# Altium PCB rtm-damp-dvb.PcbDoc (part 3 of 3)
Units mm, origin at the board's own origin, x right, y up, seen from the top; angles counter-clockwise.
Board outline 152.4 x 101.6 mm, 4 copper layers (Top Layer, GND, Vcc, Bottom Layer), stack 0.777 mm thick; 196 components, 95 nets, 559 pads, 90 vias.
Unrouted connection lines stored in the file: 129.
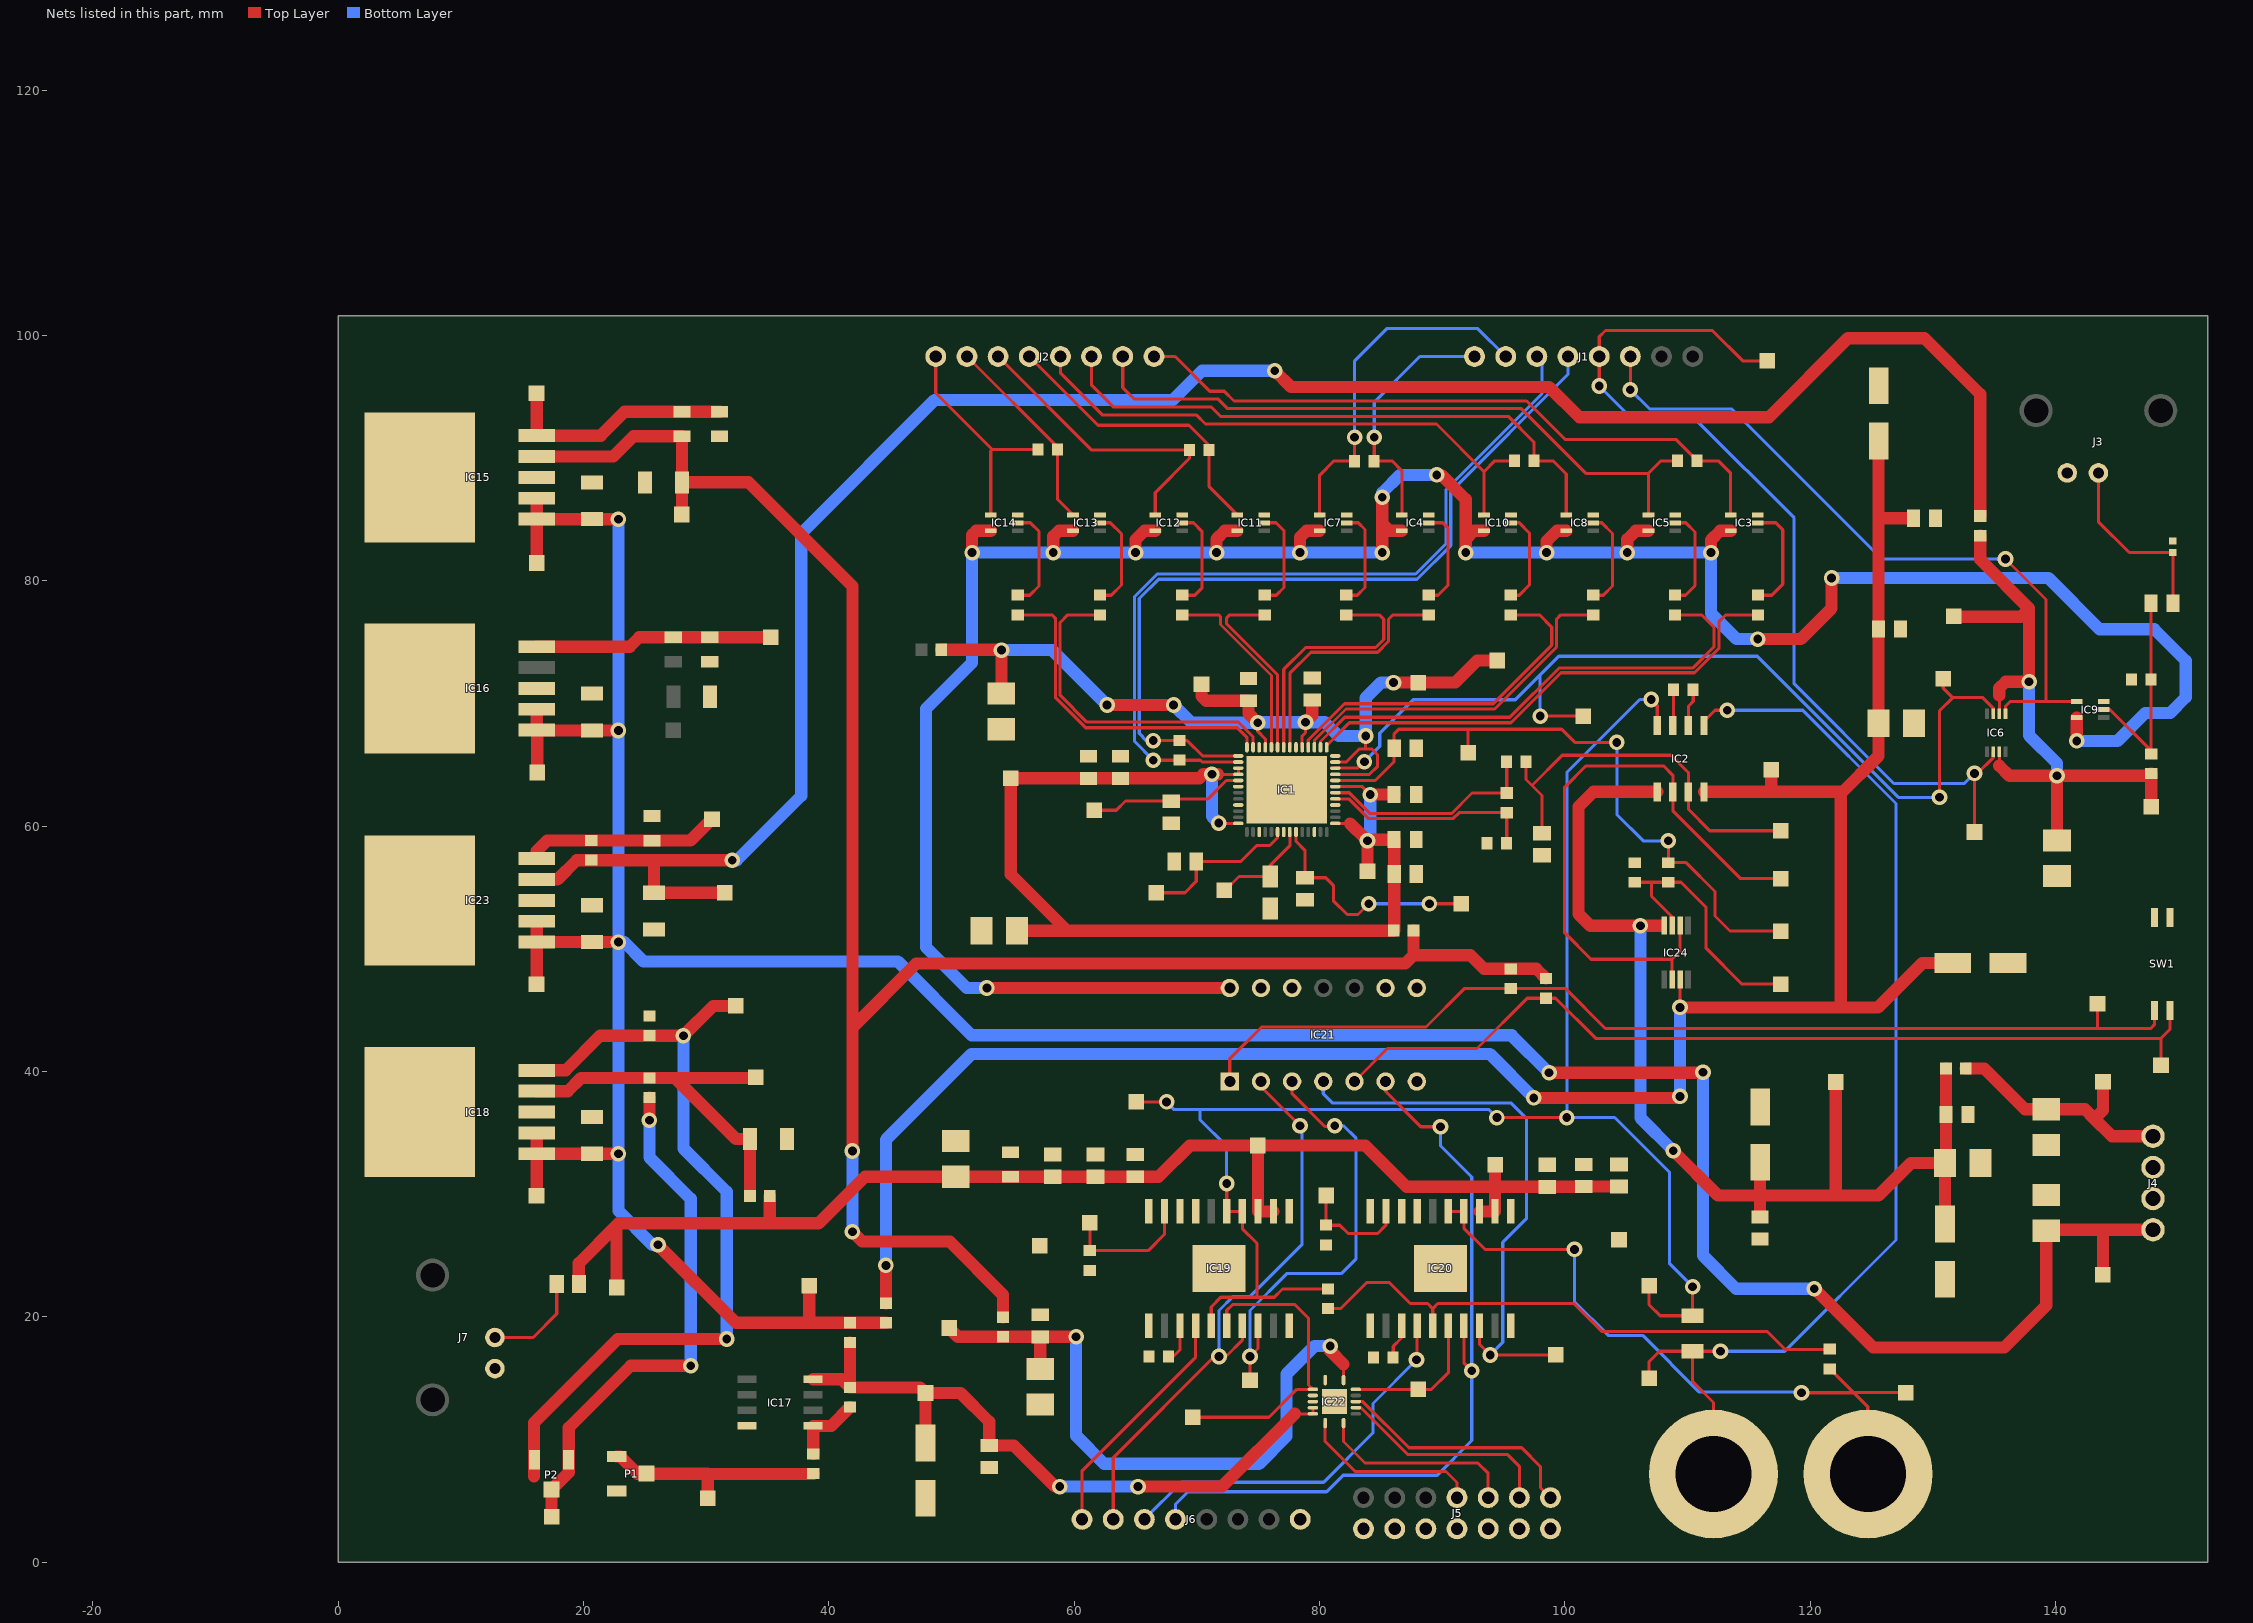
[diagram p4: the nets of this part, all layers, seen from the top]

## Via types
v1: diameter 1.27, hole 0.711, Top Layer to Bottom Layer, 90 vias

## Nets (pads, with @x,y where several pads share a name; then routed paths per layer and width w, separated by ;. In a path a pad name is that pad's centre, name@x,y a point inside that pad or via, vN(x,y) a via of type N, cw(c..) or ccw(c..) an arc to the next point about the centre after c; other vN are vias at no path point) (continued)
+2V5_ADC: +2V5_ADC.1 C8.2 C9.2 C47.1 DDR_ADC.1 IC1.23 IC1.25 IC1.31 IC1.37 L4.2 LVDS_ADC.1 | length 79.5
  Top Layer w0.254: v1(74.95,68.425) 74.95,67.725 75.575,67.1 IC1.37@75.575,66.425 ; IC1.31@78.575,66.425 78.575,67.35 78.85,67.625 v1(78.85,68.475) ; IC1.23@81.275,64.225 81.29,64.21 84.06,64.21 84.725,64.875 84.725,65.8 84.225,66.3 83.738,66.3 ; IC1.25@81.275,65.225 82.175,65.225 83.25,66.3 83.738,66.3 ; v1(83.75,67.35) 83.75,66.312 83.738,66.3
  Top Layer w1: L4.2@49.15,74.375 v1@54.075,74.375 ; C47.1@54.075,70.8 v1(54.075,74.35) ; v1(62.675,69.875) v1(68.1,69.875) ; +2V5_ADC.1@70.375,71.575 70.375,70.6 70.75,70.225 C8.2@74.2,70.225 74.2,69.175 v1(74.95,68.425) ; v1(78.85,68.475) 79.4,69.025 C9.2@79.4,70.275 ; v1(86.025,71.7) LVDS_ADC.1@88.025,71.7 91.05,71.7 92.85,73.5 DDR_ADC.1@94.475,73.5
  Bottom Layer w1: v1(54.075,74.35) 58.2,74.35 v1(62.675,69.875) ; v1(68.1,69.875) 69.55,68.425 v1(74.95,68.425) 75,68.475 v1(78.85,68.475) 80.425,68.475 81.55,67.35 v1(83.75,67.35) 83.75,70.45 85,71.7 v1(86.025,71.7)
+3V6: +3V6_LDO.1 C41.2 IC23.4 L5.1 R40.2 | length 171.8
  Top Layer w1: IC23.4@16.2,55.65 17.875,55.65 19.45,57.225 R40.2@20.625,57.225 25.75,57.225 ; +3V6_LDO.1@31.525,54.575 C41.2@25.75,54.575 25.75,57.225 ; v1(32.125,57.225) 25.75,57.225 ; v1(76.35,97.125) 77.675,95.8 98.7,95.8 101.175,93.325 116.625,93.325 123.075,99.775 129.275,99.775 133.85,95.2 L5.1@133.85,85.275
  Bottom Layer w1: v1(32.125,57.225) 32.5,57.225 37.75,62.475 37.75,83.85 48.625,94.725 68.025,94.725 70.425,97.125 v1(76.35,97.125)
+3V6_CLK: +3V6_Clock_1.1 +3V6_Clock_2.1 C48.1 IC6.2 IC6.7 L5.2 R11.2 | length 55.2
  Top Layer w0.254: 135.4,64.925 IC6.7@135.4,66.05 ; IC6.2@135.4,69.15 135.4,70.65
  Top Layer w1: +3V6_Clock_2.1@131.675,77.075 137.15,77.075 137.825,77.75 ; L5.2@133.85,83.675 133.85,81.725 137.825,77.75 ; 135.4,64.925 136.225,64.1 v1(140.1,64.1) ; 135.4,70.65 135.4,71.25 135.925,71.775 v1(137.825,71.775) 137.825,77.75 ; C48.1@140.1,58.825 v1(140.1,64.1) ; R11.2@147.75,64.3 147.55,64.1 v1(140.1,64.1) ; +3V6_Clock_1.1@147.775,61.575 R11.2@147.775,64.3
  Bottom Layer w1: v1(137.825,71.775) 137.825,67.4 140.1,65.125 v1(140.1,64.1)
+5V: +5V_LDO.1 C21.2 IC15.4 L3.1 L7.1 R23.2 R37.1 R38.1 | length 166.9
  Top Layer w1: IC15.4@16.2,90.125 22.425,90.125 24.075,91.775 R23.2@28.025,91.775 C21.2@28.025,88.025 ; +5V_LDO.1@28.025,85.4 C21.2@28.025,88.025 ; v1(41.925,26.95) 42.725,26.15 49.85,26.15 54.2,21.8 L7.1@54.2,19.975 ; v1(41.925,33.525) 41.925,79.55 33.45,88.025 C21.2@28.025,88.025 ; 41.925,43.6 47.125,48.8 86.975,48.8 87.65,49.475 ; L3.1@87.65,51.5 87.65,49.475 ; R38.1@98.45,47.575 97.65,48.375 R37.1@95.575,48.375 93.4,48.375 92.3,49.475 87.65,49.475
  Bottom Layer w1: v1(41.925,26.95) v1(41.925,33.525)
+5V_ADC: +5V_ADC.1 +5V_REFBUFEN.1 C14.2 C15.2 C16.2 C17.2 C18.2 C46.1 IC1.15 IC1.21 IC1.43 IC1.44 IC1.52 L3.2 | length 94.3
  Top Layer w0.254: v1@71.725,64.225 IC1.44@73.375,64.225 IC1.43@73.375,64.725 ; v1@71.775,60.225 IC1.52@73.375,60.225 ; IC1.15@81.275,60.225 82.475,60.225 ; IC1.21@81.275,63.225 83.475,63.225 v1(84.125,62.575)
  Top Layer w1: C46.1@55.35,51.475 59.425,51.475 ; v1@71.725,64.225 v1(71.225,64.225) 70.525,64.225 70.2,63.9 C15.2@63.775,63.9 C16.2@61.175,63.9 +5V_REFBUFEN.1@54.825,63.9 54.825,56.075 59.425,51.475 ; 82.475,60.225 v1@83.8,58.9 ; +5V_ADC.1@83.9,56.325 v1(83.9,58.8) v1@83.8,58.9 ; v1(84.125,62.575) C17.2@86.075,62.575 ; 59.425,51.475 86.025,51.475 L3.2@86.05,51.5 86.075,51.525 C14.2@86.075,56.1 C18.2@86.075,58.9 v1@83.8,58.9
  Bottom Layer w1: v1(71.225,64.225) 71.225,60.8 v1(71.775,60.25) ; v1(83.9,58.8) 84.125,59.025 v1(84.125,62.575)
+5V_DAC: +5V_DAC.1 C39.2 C50.1 IC22.14 L7.2 | length 53.2
  Top Layer w0.254: IC22.14@81.95,14.85 81.95,16.15
  Top Layer w1: +5V_DAC.1@49.8,19.1 50.525,18.375 L7.2@54.2,18.375 C39.2@57.225,18.375 ; C50.1@57.225,15.75 C39.2@57.225,18.375 ; v1(60.15,18.375) C39.2@57.225,18.375 ; v1(80.875,17.625) 80.875,17.225 81.95,16.15
  Bottom Layer w1: v1(60.15,18.375) 60.15,10.325 62.45,8.025 75.05,8.025 77.3,10.275 77.3,15.35 79.575,17.625 v1(80.875,17.625)
+7V: +7V_supply.1 C20.2 C22.2 C24.1 C28.2 C40.2 IC15.1 IC15.2 IC16.1 IC16.2 IC18.1 IC18.2 IC23.1 IC23.2 J4.1 L1.1 R28.2 Supply_+2V5.1 Supply_+3V6.1 Supply_+5V.1 Supply_Vref.1 Supply_Vs+.1 | length 291.2
  Top Layer w1: Supply_Vs+.1@16.175,29.875 16.2,29.9 IC18.1@16.2,33.3 ; Supply_+3V6.1@16.175,47.1 16.2,47.125 IC23.1@16.2,50.55 ; IC18.2@16.2,35 IC18.1@16.2,33.3 ; IC23.2@16.2,52.25 IC23.1@16.2,50.55 ; IC16.2@16.2,69.525 IC16.1@16.2,67.825 IC16.1@16.225,67.8 ; Supply_+5V.1@16.2,81.45 IC15.1@16.2,85.025 ; IC15.2@16.2,86.725 IC15.1@16.2,85.025 ; Supply_+2V5.1@16.225,64.375 IC16.1@16.225,67.8 ; v1(22.85,33.3) C28.2@20.7,33.3 IC18.1@16.2,33.3 ; v1(22.85,50.55) C40.2@20.7,50.55 IC23.1@16.2,50.55 ; v1(22.85,67.8) C20.2@20.7,67.8 IC16.1@16.225,67.8 ; v1(22.85,85.025) C22.2@20.7,85.025 IC15.1@16.2,85.025 ; v1(26.075,25.875) 32.425,19.525 38.275,19.525 ; Supply_Vref.1@38.4,22.55 38.4,19.65 38.275,19.525 ; L1.1@44.65,19.525 R28.2@41.725,19.525 38.275,19.525 ; v1(98.7,39.9) 111.2,39.9 v1(111.25,39.95) ; v1(120.325,22.3) 125.125,17.5 135.8,17.5 139.225,20.925 C24.1@139.225,27.025 139.305,27.105 143.8,27.105 ; +7V_supply.1@143.85,23.425 143.85,27.055 143.8,27.105 ; J4.1@147.925,27.105 143.8,27.105
  Bottom Layer w1: v1(22.85,85.025) v1(22.85,67.8) v1(22.85,50.55) ; v1(26.075,25.875) 25.625,25.875 22.85,28.65 v1(22.85,33.3) v1(22.85,50.55) ; v1(98.7,39.9) 95.65,42.95 51.65,42.95 45.625,48.975 24.9,48.975 23.325,50.55 v1(22.85,50.55) ; v1(111.25,39.95) 111.25,25 113.95,22.3 v1(120.325,22.3)
+7V_opamp: +7V_opamp.1 C1.1 C2.1 C26.1 C42.1 C43.2 IC2.8 IC24.7 L1.2 | length 179.3
  Top Layer w0.254: v1(109.375,45.225) IC24.7@109.375,47.5
  Top Layer w1: L1.2@44.65,21.125 v1(44.65,24.2) ; v1(97.45,37.85) 109.25,37.85 v1(109.375,37.975) ; v1(109.375,45.225) 122.475,45.225 ; IC2.8@111.33,62.8 116.85,62.8 ; +7V_opamp.1@116.8,64.6 116.8,62.85 116.85,62.8 ; 122.388,62.563 125.55,65.725 C26.1@125.55,68.4 C43.2@125.55,76.075 C2.1@125.55,91.4 ; 125.55,85.1 C1.1@128.4,85.1 ; C42.1@131.6,48.85 129.125,48.85 125.5,45.225 122.475,45.225 ; 116.85,62.8 122.475,62.8 122.475,45.225
  Bottom Layer w1: v1(44.65,24.2) 44.65,34.45 51.625,41.425 93.875,41.425 v1(97.45,37.85) ; v1(109.375,37.975) v1(109.375,45.225)
+Vref: +Vref_DAC.1 C37.1 C38.2 IC17.8 IC22.5 IC22.6 R28.1 R30.2 | length 56.2
  Top Layer w0.254: 77.975,12.1 IC22.6@79.45,12.1 IC22.5@79.45,12.6
  Top Layer w1: IC17.8@38.725,14.93 41.045,14.93 R30.2@41.725,14.25 ; R28.1@41.725,17.925 R30.2@41.725,14.25 ; C37.1@47.875,9.725 +Vref_DAC.1@47.875,13.8 ; v1(58.825,6.175) 58.425,6.175 55.075,9.525 C38.2@53.075,9.525 53.075,11.45 50.725,13.8 +Vref_DAC.1@47.875,13.8 ; v1(65.2,6.175) 72.05,6.175 77.975,12.1 ; R30.2@41.725,14.25 47.425,14.25 +Vref_DAC.1@47.875,13.8
  Bottom Layer w1: v1(58.825,6.175) v1(65.2,6.175)
-7V: -7V_supply.1 C25.2 J4.4 L2.1 | length 20.9
  Top Layer w1: L2.1@132.65,40.25 134.175,40.25 137.5,36.925 C25.2@139.225,36.925 142.375,36.925 143.075,36.225 ; -7V_supply.1@143.85,39.175 143.85,36.85 143.225,36.225 143.075,36.225 ; J4.4@147.925,34.725 144.575,34.725 143.075,36.225
-7V_opamp: -7V_opamp.1 C5.2 C6.2 C27.2 C44.2 C45.2 IC2.5 IC24.4 L2.2 | length 93.5
  Top Layer w1: IC2.5@107.52,62.8 102.325,62.8 101.1,61.575 101.1,52.85 102.075,51.875 v1(106.15,51.875) 107.822,51.875 ; v1(108.825,33.55) 112.475,29.9 115.9,29.9 ; C45.2@115.9,28.15 115.9,29.9 ; C44.2@115.9,32.6 115.9,29.9 ; -7V_opamp.1@122.075,39.15 122.075,30.1 122.275,29.9 ; C5.2@130.975,27.575 C27.2@130.975,32.55 ; L2.2@131.05,40.25 C6.2@131.05,36.5 131.05,32.625 130.975,32.625 130.9,32.55 128.2,32.55 125.55,29.9 122.275,29.9 ; 115.9,29.9 122.275,29.9
  Bottom Layer w1: v1(106.15,51.875) 106.15,36.225 v1(108.825,33.55)
AIN1_N: C3.1 IC1.19 R3.2 | length 17.3
  Top Layer w0.254: IC1.19@81.275,62.225 82.375,62.225 83.962,60.638 90.906,60.638 91.368,61.1 C3.1@95.25,61.1 R3.2@95.25,58.6
AIN1_P: C3.2 IC1.20 R1.2 | length 17.9
  Top Layer w0.254: IC1.20@81.275,62.725 82.418,62.725 84.122,61.022 90.747,61.022 92.425,62.7 C3.2@95.25,62.7 R1.2@95.25,65.25
C\L\R\: CLR_clk.1 CLR_con.1 IC6.6 J1.5 | length 78.5
  Top Layer w0.254: v1(102.8,95.875) 102.79,95.885 J1.5@102.79,98.275 102.79,99.89 103.3,100.4 112,100.4 114.475,97.925 CLR_con.1@116.5,97.925 ; CLR_clk.1@133.375,59.525 v1(133.375,64.3) 133.621,64.3 134.9,65.579 IC6.6@134.9,66.05
  Bottom Layer w0.254: v1(102.8,95.875) 105.7,92.975 110.825,92.975 118.675,85.125 118.675,71.6 126.8,63.475 132.55,63.475 v1(133.375,64.3)
C\N\V\: CNV_ADC.1 CNV_clk.1 IC1.24 IC6.3 | length 79.8
  Top Layer w0.254: IC1.24@81.275,64.725 83.075,64.725 83.6,65.25 v1(83.65,65.25) ; v1(97.975,68.975) CNV_ADC.1@101.5,68.975 ; v1(130.525,62.35) 130.525,69.4 131.6,70.475 ; CNV_clk.1@130.825,72.025 130.825,71.25 131.6,70.475 ; IC6.3@134.9,69.15 134.9,69.621 134.046,70.475 131.6,70.475
  Bottom Layer w0.254: v1(83.65,65.25) 84.9,66.5 84.9,67.575 87.625,70.3 95.95,70.3 97.9,72.25 ; v1(97.975,68.975) 97.975,72.175 97.9,72.25 ; v1(130.525,62.35) 127.175,62.35 115.675,73.85 99.5,73.85 97.9,72.25
C\S\_DAC: IC22.7 J5.7 | length 14.9
  Top Layer w0.254: IC22.7@80.45,11.35 80.45,9.85 82.9,7.4 90.3,7.4 91.2,6.5 J5.7@91.2,5.27
CLKOUT_N: IC1.34 R10.2 | length 20.3
  Top Layer w0.254: IC1.34@77.075,66.425 77.075,72.775 78.859,74.559 84.566,74.559 85.225,75.218 85.225,76.85 84.85,77.225 R10.2@82.175,77.225
CLKOUT_P: IC1.33 R7.2 | length 20.4
  Top Layer w0.254: IC1.33@77.575,66.425 77.575,72.45 79.3,74.175 84.725,74.175 85.609,75.059 85.609,76.85 85.984,77.225 R7.2@88.9,77.225
Enable_1: EN_1_SW.1 IC21.1 R37.2 SW1.1 | length 84.2
  Top Layer w0.254: IC21.1@72.68,39.19 72.68,41.03 75.275,43.625 88.675,43.625 91.825,46.775 R37.2@95.575,46.775 100.025,46.775 103.287,43.513 143.4,43.513 ; EN_1_SW.1@143.4,45.525 143.4,43.513 ; SW1.1@148.04,44.975 148.04,43.815 147.737,43.513 143.4,43.513
Enable_2: EN_2_SW.1 IC21.5 R38.2 SW1.2 | length 74.7
  Top Layer w0.254: IC21.5@82.84,39.19 85.525,41.875 92.825,41.875 96.925,45.975 R38.2@98.45,45.975 99.225,45.975 102.5,42.7 148.575,42.7 ; EN_2_SW.1@148.575,40.525 148.575,42.7 ; SW1.2@149.31,44.975 149.31,43.435 148.575,42.7
GND: C1.2 C2.2 C4.1 C5.1 C6.1 C7.2 C8.1 C9.1 C10.1 C11.1 C12.1 C13.1 C14.1 C15.1 C16.1 C17.1 C18.1 C20.1 C21.1 C22.1 C23.1 C24.2 C25.1 C26.2 C27.1 C28.1 C29.1 C30.2 C31.2 C32.2 C33.2 C34.1 C35.1 C37.2 C38.1 C39.1 C40.1 C41.1 C42.2 C43.1 C44.1 C45.1 C46.2 C47.2 C48.2 C49.2 C50.2 IC1.3 IC1.7 IC1.12 IC1.18 IC1.26 IC1.32 IC1.38 IC1.46 IC1.49 IC1.53 IC3.3 IC4.3 IC5.3 IC7.3 IC8.3 IC9.3 IC10.3 IC11.3 IC12.3 IC13.3 IC14.3 IC15.3 IC15.6 IC16.3 IC16.6 IC17.4 IC18.3 IC18.6 IC19.1 IC19.10 IC19.11 IC19.17 IC19.18 IC19.20 IC19.21 IC20.1 IC20.10 IC20.11 IC20.17 IC20.18 IC20.20 IC20.21 IC21.7 IC21.8 IC21.9 IC21.12 IC21.13 IC22.1 IC22.3 IC22.4 IC22.15 IC23.3 IC23.6 J3.2 J4.2 J4.3 J5.2 J5.4 J5.6 J5.8 J5.10 J5.12 J5.14 J6.8 J7.2 P1.3 R3.1 R15.1 R16.1 R25.1 R26.1 R29.1 R33.2 R34.1 R35.2 R36.1 R39.1 R41.1 R44.1 SW1.3 SW1.4 Vs-_1.1 Vs-_2.1
IFLAG_1: IC19.4 J6.1 | length 19.6
  Top Layer w0.254: J6.1@60.64,3.5 60.64,7.465 69.895,16.72 IC19.4@69.895,19.3
IFLAG_2: IC20.4 J6.3 | length 31.9
  Top Layer w0.254: J6.3@65.72,3.5 J6.3@65.8,3.58 ; v1(87.9,16.5) 87.95,16.55 IC20.4@87.95,19.3
  Bottom Layer w0.254: J6.3@65.72,3.5 68.745,6.525 80.325,6.525 84.35,10.55 84.35,12.95 v1(87.9,16.5)
IN+_1: IC19.6 IC22.2 IN+_1.1 | length 25.2
  Top Layer w0.254: IN+_1.1@69.675,11.825 75.875,11.825 78.15,14.1 IC22.2@79.45,14.1 79.1,14.45 79.1,19.9 78,21 72.9,21 72.435,20.535 IC19.6@72.435,19.3
IN+_2: IC20.6 IC22.13 IN+_2.1 | length 11.9
  Top Layer w0.254: IC22.13@82.95,14.1 IN+_2.1@88.05,14.1 89.125,14.1 90.49,15.465 IC20.6@90.49,19.3
L\D\A\C\: IC22.11 J5.1 | length 20.1
  Top Layer w0.254: IC22.11@82.95,13.1 83.525,13.1 87.287,9.337 96.462,9.337 98,7.8 98,6.09 J5.1@98.82,5.27
Master_Clock: IC6.1 IC9.4 J1.6 | length 58.6
  Top Layer w0.254: v1(105.325,95.575) 105.33,95.575 J1.6@105.33,98.275 ; IC6.1@135.9,69.15 135.9,69.775 136.275,70.15 139.2,70.15 ; v1(135.9,81.775) 139.2,78.475 139.2,70.15 ; IC9.4@141.7,70.15 139.2,70.15
  Bottom Layer w0.254: v1(105.325,95.575) 106.9,94 113.6,94 125.825,81.775 v1(135.9,81.775)
Net+2V5_adj_1: +2V5_adj.1 IC16.5 R24.1 R26.2 | length 19.4
  Top Layer w1: IC16.5@16.2,74.625 23.775,74.625 24.55,75.4 R24.1@27.325,75.4 R26.2@30.3,75.4 +2V5_adj.1@35.25,75.4
Net+3V6_adj_1: +3V6_adj.1 IC23.5 R40.1 R41.2 | length 16
  Top Layer w1: IC23.5@16.2,57.35 16.2,57.975 17.05,58.825 R40.1@20.625,58.825 R41.2@25.575,58.825 28.725,58.825 +3V6_adj.1@30.475,60.575
Net+5V_adj_1: +5V_adj.1 IC15.5 R23.1 R25.2 | length 19.2
  Top Layer w1: +5V_adj.1@16.175,95.3 16.2,95.275 IC15.5@16.2,91.825 21.4,91.825 23.35,93.775 R23.1@28.025,93.775 R25.2@31.1,93.775
NetC4_2: C4.2 IC2.7 OUT_opamp.1 R1.1 | length 32
  Top Layer w0.254: R1.1@96.825,65.25 96.825,63.8 97.313,63.312 ; C4.2@98.125,59.425 98.125,62.5 97.313,63.312 ; OUT_opamp.1@117.6,59.625 111.8,59.625 110.06,61.365 IC2.7@110.06,62.8 110.06,64.365 108.65,65.775 99.775,65.775 97.313,63.312
NetC7_1: C7.1 IC1.8 REF_ADC.1 | length 8.5
  Top Layer w0.254: REF_ADC.1@72.225,54.775 72.3,54.775 73.425,55.9 C7.1@75.975,55.9 75.975,56.8 77.575,58.4 IC1.8@77.575,59.525
NetC10_2: C10.2 IC1.6 REFOUT3.1 | length 13.1
  Top Layer w0.254: REFOUT3.1@66.7,54.575 69.025,54.575 69.95,55.5 C10.2@69.95,57.125 73.575,57.125 74.875,58.425 75.925,58.425 76.575,59.075 IC1.6@76.575,59.525
NetC11_2: C11.2 IC1.9 REFOUT2.1 | length 19.1
  Top Layer w0.254: IC1.9@78.075,59.525 78.075,58.775 78.8,58.05 C11.2@78.8,55.8 80.5,55.8 81.125,55.175 81.125,53.925 82.25,52.8 83.125,52.8 v1(84,53.675) ; v1(88.95,53.675) REFOUT2.1@91.55,53.675
  Bottom Layer w0.254: v1(84,53.675) v1(88.95,53.675)
NetC13_2: C13.2 IC1.45 REFOUT4.1 | length 12.8
  Top Layer w0.254: REFOUT4.1@61.625,61.3 63.425,61.3 64.175,62.05 C13.2@67.9,62.05 68.05,62.2 70.875,62.2 72.4,63.725 IC1.45@73.375,63.725
NetC19_1: C19.1 J3.1 R15.2 | length 15.2
  Top Layer w0.254: J3.1@143.475,88.795 143.475,84.825 145.995,82.305 R15.2@149.525,82.305 149.55,82.28 C19.1@149.55,78.175
NetC19_2: C19.2 IC9.2 R11.1 R16.2 | length 17.8
  Top Layer w0.254: IC9.2@143.9,69.5 144.425,69.5 147.775,66.15 R11.1@147.775,65.9 R16.2@147.775,71.95 147.75,71.975 C19.2@147.75,78.175
NetC36_2: C36.2 J7.1 | length 8.3
  Top Layer w0.254: J7.1@12.78,18.325 15.9,18.325 17.825,20.25 C36.2@17.825,22.675
NetEN_1_1: EN_1.1 IC19.8 IC21.3 | length 36.4
  Top Layer w0.254: EN_1.1@74.325,14.85 v1(74.325,16.775) 74.975,17.425 IC19.8@74.975,19.3 ; IC21.3@77.76,39.19 77.76,38.19 80.425,35.525 v1@81.225,35.525
  Bottom Layer w0.254: v1(74.325,16.775) 74.325,20.525 77.325,23.525 81.75,23.525 82.975,24.75 82.975,34.55 81.95,35.575 v1(81.225,35.575)
NetEN_2_1: EN_2.1 IC20.8 IC21.4 | length 47
  Top Layer w0.254: IC20.8@93.03,19.3 93.03,17.77 v1(93.9,16.9) 99.225,16.9 EN_2.1@99.25,16.925
  Bottom Layer w0.254: IC21.4@80.3,39.19 80.3,38.2 81.075,37.425 95.625,37.425 96.85,36.2 96.85,28 94.925,26.075 94.925,17.925 v1(93.9,16.9)
NetIC2_2: IC2.2 RG.2 | length 3.1
  Top Layer w0.254: IC2.2@110.06,68.2 110.06,69.785 110.45,70.175 RG.2@110.45,71.125
NetIC2_3: IC2.3 RG.1 | length 2.9
  Top Layer w0.254: IC2.3@108.79,68.2 108.85,68.26 RG.1@108.85,71.125
NetIC3_2: IC3.2 R5.1 | length 9.1
  Top Layer w0.254: IC3.2@115.7,84.725 117.175,84.725 117.75,84.15 117.75,79.725 116.85,78.825 R5.1@115.725,78.825
NetIC3_4: IC3.4 J2.1 R6.1 | length 54.3
  Top Layer w0.254: J2.1@66.495,98.275 68.225,98.275 71.05,95.45 72.225,95.45 73.025,94.65 96.875,94.65 100,91.525 109.025,91.525 R6.1@110.775,89.775 112.5,89.775 113.5,88.775 IC3.4@113.5,85.375
NetIC4_2: IC4.2 R7.1 | length 8.3
  Top Layer w0.254: R7.1@88.9,78.825 89.65,78.825 90.475,79.65 90.475,84.275 90.025,84.725 IC4.2@88.9,84.725
NetIC4_4: IC4.4 J1.1 R9.2 | length 20.7
  Top Layer w0.254: R9.2@84.45,89.75 R9.2@84.45,89.775 ; v1(84.45,91.7) R9.2@84.45,89.775 ; IC4.4@86.7,85.375 86.7,88.975 85.9,89.775 R9.2@84.45,89.775
  Bottom Layer w0.254: v1(84.45,91.7) 84.45,94.55 88.175,98.275 J1.1@92.63,98.275
NetIC5_2: IC5.2 R8.1 | length 8.2
  Top Layer w0.254: R8.1@108.975,78.825 109.825,78.825 110.6,79.6 110.6,83.975 109.85,84.725 IC5.2@109,84.725
NetIC5_4: IC5.4 J2.2 R6.2 | length 54.4
  Top Layer w0.254: J2.2@63.955,98.275 63.955,95.745 64.875,94.825 71.7,94.825 72.475,94.05 96.4,94.05 101.7,88.75 106.8,88.75 ; IC5.4@106.8,85.375 106.8,88.75 ; R6.2@109.175,89.775 107.825,89.775 106.8,88.75
NetIC7_2: IC7.2 R10.1 | length 8.2
  Top Layer w0.254: R10.1@82.175,78.825 83.075,78.825 83.7,79.45 83.7,84.175 83.15,84.725 IC7.2@82.2,84.725
NetIC7_4: IC7.4 J1.2 R9.1 | length 29.1
  Top Layer w0.254: IC7.4@80,85.375 80,88.6 81.175,89.775 R9.1@82.85,89.775 ; R9.1@82.85,89.75 R9.1@82.85,89.775 ; v1(82.85,91.7) R9.1@82.85,89.775
  Bottom Layer w0.254: v1(82.85,91.7) 82.85,97.925 85.475,100.55 92.895,100.55 J1.2@95.17,98.275
NetIC8_2: IC8.2 R12.1 | length 8.1
  Top Layer w0.254: R12.1@102.3,78.825 103.125,78.825 103.875,79.575 103.875,83.85 103,84.725 IC8.2@102.3,84.725
NetIC8_4: IC8.4 J2.3 R13.1 | length 48.2
  Top Layer w0.254: J2.3@61.415,98.275 61.415,95.935 63.175,94.175 71.15,94.175 71.925,93.4 95.375,93.4 97.475,91.3 R13.1@97.475,89.775 99.025,89.775 100.1,88.7 IC8.4@100.1,85.375
NetIC10_2: IC10.2 R14.1 | length 8
  Top Layer w0.254: R14.1@95.575,78.825 96.275,78.825 97.1,79.65 97.1,83.9 96.275,84.725 IC10.2@95.6,84.725
NetIC10_4: IC10.4 J2.4 R13.2 | length 45.1
  Top Layer w0.254: J2.4@58.875,98.275 58.875,96.95 62.325,93.5 69.975,93.5 70.7,92.775 89.525,92.775 93.4,88.9 ; IC10.4@93.4,85.375 93.4,88.9 ; R13.2@95.475,89.775 94.275,89.775 93.4,88.9
NetIC11_2: IC11.2 R17.1 | length 8.3
  Top Layer w0.254: IC11.2@75.5,84.725 76.45,84.725 77.1,84.075 77.1,79.45 76.475,78.825 R17.1@75.525,78.825
NetIC11_4: IC11.4 J2.5 R18.1 | length 24.3
  Top Layer w0.254: J2.5@56.335,98.275 61.935,92.675 69.35,92.675 71,91.025 R18.1@71,90.65 71,87.675 IC11.4@73.3,85.375
NetIC12_2: IC12.2 R19.1 | length 8.4
  Top Layer w0.254: R19.1@68.8,78.825 69.825,78.825 70.4,79.4 70.4,84.05 69.725,84.725 IC12.2@68.8,84.725
NetIC12_4: IC12.4 J2.6 R18.2 | length 25.2
  Top Layer w0.254: J2.6@53.795,98.275 61.42,90.65 R18.2@69.4,90.65 69.4,89.975 66.6,87.175 IC12.4@66.6,85.375
NetIC13_2: IC13.2 R20.1 | length 8.4
  Top Layer w0.254: R20.1@62.1,78.825 63.025,78.825 63.85,79.65 63.85,83.825 62.95,84.725 IC13.2@62.1,84.725
NetIC13_4: IC13.4 J2.7 R21.1 | length 16.5
  Top Layer w0.254: J2.7@51.255,98.275 58.65,90.88 R21.1@58.65,90.7 58.65,86.625 IC13.4@59.9,85.375
NetIC14_2: IC14.2 R22.1 | length 8.5
  Top Layer w0.254: R22.1@55.4,78.825 56.375,78.825 57.125,79.575 57.125,84.025 56.425,84.725 IC14.2@55.4,84.725
NetIC14_4: IC14.4 J2.8 R21.2 | length 18.6
  Top Layer w0.254: J2.8@48.715,98.275 48.715,95.31 53.325,90.7 ; IC14.4@53.2,85.375 53.2,90.575 53.325,90.7 ; R21.2@57.05,90.7 53.325,90.7
NetIC17_5: IC17.5 R30.1 R42.2 | length 5.9
  Top Layer w1: R42.2@38.725,8.825 IC17.5@38.725,11.12 40.195,11.12 R30.1@41.725,12.65
NetIC18_5: IC18.5 P2.3 R29.2 Vs_pot_2.1 | length 67.5
  Top Layer w1: 15.975,6.99 15.975,11.375 22.8,18.2 v1(31.675,18.2) ; IC18.5@16.2,40.1 18.55,40.1 21.375,42.925 R29.2@25.375,42.925 v1(28.15,42.925) 30.575,45.35 Vs_pot_2.1@32.425,45.35
  Bottom Layer w1: v1(28.15,42.925) 28.15,33.725 31.675,30.2 v1(31.675,18.2)
NetIC19_3: IC19.3 R35.1 | length 3.1
  Top Layer w0.254: R35.1@67.7,16.775 68.075,16.775 68.625,17.325 IC19.3@68.625,19.3
NetIC19_19: IC19.19 Im_1.1 R33.1 | length 10.8
  Top Layer w0.254: Im_1.1@61.275,27.675 R33.1@61.275,25.4 66.025,25.4 67.355,26.73 IC19.19@67.355,28.6
NetIC20_3: IC20.3 R36.2 | length 2.9
  Top Layer w0.254: R36.2@86,16.7 86,17.6 86.68,18.28 IC20.3@86.68,19.3
NetIC20_5: IC20.5 R31.2 R32.2 | length 45.8
  Top Layer w0.254: R31.2@80.675,20.675 81.7,20.675 83.825,22.8 85.7,22.8 87.4,21.1 88.8,21.1 89.22,20.68 ; IC20.5@89.22,19.3 89.22,20.68 ; R32.2@121.575,17.375 121.55,17.35 117.95,17.35 116.5,18.8 103.025,18.8 100.725,21.1 89.64,21.1 89.22,20.68
NetIC20_19: IC20.19 Im_2.1 R34.2 | length 9
  Top Layer w0.254: Im_2.1@80.525,29.9 R34.2@80.525,27.475 81.65,27.475 82.325,26.8 84.725,26.8 85.4,27.475 85.4,28.59 IC20.19@85.41,28.6
NetIC24_3: IC24.3 R43.1 R44.2 V+_op1177.1 | length 21.5
  Top Layer w0.254: R44.2@105.675,55.425 107.05,55.425 ; IC24.3@108.725,51.9 108.725,52.621 107.05,54.296 107.05,55.425 ; V+_op1177.1@117.6,47.125 114.425,47.125 111.5,50.05 111.5,53.375 109.45,55.425 R43.1@108.425,55.425 107.05,55.425
NetP1_1: P1.1 P1.2 R42.1 Vref_pot.1 | length 18.6
  Top Layer w1: P1.1@22.71,8.625 23,8.625 24.4,7.225 P1.2@25.14,7.225 30.1,7.225 30.125,7.2 ; Vref_pot.1@30.125,5.225 30.125,7.2 ; R42.1@38.725,7.2 30.125,7.2
NetP2_1: P2.1 P2.2 R27.1 Vs_pot_1.1 | length 43.1
  Top Layer w1: Vs_pot_1.1@17.4,3.7 P2.2@17.4,5.925 18.8,7.325 P2.1@18.8,8.355 18.8,10.975 23.85,16.025 v1(28.75,16.025) ; v1(25.375,36.025) R27.1@25.375,37.875
  Bottom Layer w1: v1(25.375,36.025) 25.375,33 28.75,29.625 v1(28.75,16.025)
REF_opamp: IC2.6 IC24.2 IC24.6 REF_opamp.1 | length 50
  Top Layer w0.254: IC24.6@108.725,47.5 108.725,49.15 ; IC24.2@109.375,51.9 109.375,49.8 108.725,49.15 ; REF_opamp.1@117.6,55.725 114.325,55.725 108.79,61.26 IC2.6@108.79,62.8 108.79,64.16 108.05,64.9 101.7,64.9 99.975,63.175 99.975,51.3 102.125,49.15 108.725,49.15
REFOUT1: C12.2 IC1.22 R43.2 REFOUT1.1 REFOUT1_opamp.1 | length 53.8
  Top Layer w0.254: IC1.22@81.275,63.725 84.525,63.725 86.075,65.275 C12.2@86.075,66.35 86.075,67.525 86.45,67.9 92.125,67.9 ; REFOUT1.1@92.1,65.975 92.1,67.875 92.125,67.9 ; v1(104.225,66.825) 100.8,66.825 99.725,67.9 92.125,67.9 ; v1(108.425,58.8) R43.2@108.425,57.025 109.875,57.025 112.225,54.675 112.225,52.675 113.45,51.45 REFOUT1_opamp.1@117.6,51.45
  Bottom Layer w0.254: v1(104.225,66.825) 104.225,60.95 106.375,58.8 v1(108.425,58.8)
Rshunt: IC2.1 load_1.1 R2.2 Rshunt_2.1 | length 91.4
  Top Layer w0.254: Rshunt_2.1@106.85,15 106.85,16.35 107.7,17.2 R2.2@110.4,17.2 ; IC2.1@111.33,68.2 111.33,68.555 112.225,69.45 v1(113.225,69.45) ; load_1.1@112.1,7.2 112.1,13.025 110.4,14.725 R2.2@110.4,17.2 ; v1(112.675,17.2) R2.2@110.4,17.2
  Bottom Layer w0.254: v1(112.675,17.2) 117.9,17.2 126.975,26.275 126.975,61.85 119.375,69.45 v1(113.225,69.45)
SCK_N: IC1.42 J1.3 R4.2 | length 66.8
  Top Layer w0.254: v1(66.45,65.375) R4.2@68.575,65.375 70.259,65.375 70.409,65.225 IC1.42@73.375,65.225
  Bottom Layer w0.254: v1(66.45,65.375) 64.916,66.909 64.916,78.709 66.757,80.55 87.825,80.55 90.3,83.025 90.3,87.425 98.125,95.25 98.125,97.86 J1.3@97.71,98.275
SCK_P: IC1.41 J1.4 R4.1 | length 66.4
  Top Layer w0.254: v1(66.45,66.975) 67.948,66.975 R4.1@68.575,66.975 69.202,66.975 70.452,65.725 IC1.41@73.375,65.725
  Bottom Layer w0.254: v1(66.45,66.975) 65.884,66.975 65.3,67.559 65.3,78.55 66.875,80.125 87.943,80.125 90.684,82.866 90.684,87.266 100.25,96.832 J1.4@100.25,98.275
SCLK_DAC: IC22.8 J5.5 | length 16.4
  Top Layer w0.254: IC22.8@81.95,11.35 81.95,9.85 83.7,8.1 92.9,8.1 93.74,7.26 J5.5@93.74,5.27
SDI_DAC: IC22.10 J5.3 | length 17.9
  Top Layer w0.254: IC22.10@82.95,12.6 83.375,12.6 87.2,8.775 95.325,8.775 96.28,7.82 J5.3@96.28,5.27
SDOA_N: IC1.28 R8.2 | length 40.9
  Top Layer w0.254: IC1.28@80.075,66.425 80.075,66.901 82.049,68.875 95.507,68.875 99.516,72.884 110.4,72.884 112.158,74.642 112.158,76.192 111.125,77.225 R8.2@108.975,77.225
SDOA_P: IC1.27 R5.2 | length 41
  Top Layer w0.254: IC1.27@80.575,66.425 80.575,66.575 82.425,68.425 95.6,68.425 99.675,72.5 110.559,72.5 112.542,74.483 112.542,76.65 113.117,77.225 R5.2@115.725,77.225
SDOB_N: IC1.30 R14.2 | length 28.9
  Top Layer w0.254: IC1.30@79.075,66.425 79.075,67.02 82.03,69.975 94.15,69.975 98.925,74.75 98.925,76.225 97.925,77.225 R14.2@95.575,77.225
SDOB_P: IC1.29 R12.2 | length 28.9
  Top Layer w0.254: IC1.29@79.575,66.425 79.575,66.977 82.148,69.55 94.268,69.55 99.309,74.591 99.309,76.875 99.659,77.225 R12.2@102.3,77.225
SDOC_N: IC1.36 R19.2 | length 15.6
  Top Layer w0.254: R19.2@68.8,77.225 71.766,77.225 71.916,77.075 71.916,76.434 76.075,72.275 IC1.36@76.075,66.425
SDOC_P: IC1.35 R17.2 | length 15.5
  Top Layer w0.254: R17.2@75.525,77.225 72.675,77.225 72.425,76.975 72.425,76.475 76.575,72.325 IC1.35@76.575,66.425
SDOD_N: IC1.40 R22.2 | length 27.4
  Top Layer w0.254: R22.2@55.4,77.225 58.191,77.225 58.466,76.95 58.466,70.5 60.941,68.025 73.3,68.025 74.075,67.25 IC1.40@74.075,66.425
SDOD_P: IC1.39 R20.2 | length 27.4
  Top Layer w0.254: R20.2@62.1,77.225 59.475,77.225 58.85,76.6 58.85,70.659 61.034,68.475 73.393,68.475 74.575,67.293 IC1.39@74.575,66.425
TFLAG_1: IC19.7 IC21.2 J6.2 | length 48.1
  Top Layer w0.254: J6.2@63.18,3.5 63.18,8.53 71.425,16.775 v1(71.8,16.775) 72.375,16.775 73.705,18.105 IC19.7@73.705,19.3 ; IC21.2@75.22,39.19 75.22,38.755 v1(78.4,35.575)
  Bottom Layer w0.254: v1(71.8,16.775) 71.8,20.525 72.95,21.675 74.35,21.675 78.55,25.875 78.55,35.425 v1(78.4,35.575)
TFLAG_2: IC20.7 IC21.6 J6.4 | length 64.6
  Top Layer w0.254: J6.4@68.26,3.5 J6.4@68.3,3.54 ; IC21.6@85.38,39.19 85.38,38.37 88.25,35.5 v1(89.85,35.5) ; IC20.7@91.76,19.3 91.76,16.265 v1(92.4,15.625)
  Bottom Layer w0.254: J6.4@68.26,3.5 68.26,4.735 69.275,5.75 80.575,5.75 81.925,7.1 89.575,7.1 92.4,9.925 v1(92.4,15.625) 92.4,31.4 89.85,33.95 v1(89.85,35.5)
VDD: IC3.5 IC4.5 IC5.5 IC7.5 IC8.5 IC9.5 IC10.5 IC11.5 IC12.5 IC13.5 IC14.5 IC21.14 | length 224.7
  Top Layer w1: v1(51.675,82.3) 51.675,83.725 52.025,84.075 IC14.5@53.2,84.075 ; v1(52.885,46.81) IC21.14@72.68,46.81 ; v1(58.3,82.3) 58.3,83.625 58.75,84.075 IC13.5@59.9,84.075 ; v1(65,82.3) 65,83.35 65.725,84.075 IC12.5@66.6,84.075 ; v1(71.6,82.3) 71.6,83.4 72.275,84.075 IC11.5@73.3,84.075 ; v1(78.4,82.3) 78.4,83.55 78.925,84.075 IC7.5@80,84.075 ; v1(85.1,82.3) 85.1,84.675 ; v1(85.1,86.8) 85.1,84.675 ; IC4.5@86.7,84.075 85.7,84.075 85.1,84.675 ; v1(89.55,88.625) 89.925,88.625 91.9,86.65 91.9,83.375 ; v1(91.9,82.3) 91.9,83.375 ; IC10.5@93.4,84.075 92.6,84.075 91.9,83.375 ; v1(98.5,82.3) 98.5,83.225 99.35,84.075 IC8.5@100.1,84.075 ; v1(105.075,82.3) 105.075,83.375 105.775,84.075 IC5.5@106.8,84.075 ; v1(111.9,82.3) 111.9,83.325 112.65,84.075 IC3.5@113.5,84.075 ; v1(115.7,75.25) 119.225,75.25 121.725,77.75 v1(121.725,80.225) ; v1(141.7,66.95) IC9.5@141.7,68.85
  Bottom Layer w1: v1(52.885,46.81) 51.24,46.81 47.925,50.125 47.925,69.575 51.675,73.325 v1(51.675,82.3) v1(58.3,82.3) v1(65,82.3) v1(71.6,82.3) v1(78.4,82.3) v1(85.1,82.3) ; v1(85.1,86.8) 85.1,87.175 86.55,88.625 v1(89.55,88.625) ; v1(91.9,82.3) v1(98.5,82.3) v1(105.075,82.3) v1(111.9,82.3) 111.9,77.325 113.975,75.25 v1(115.7,75.25) ; v1(121.725,80.225) 139.4,80.225 143.575,76.05 148.025,76.05 150.6,73.475 150.6,70.5 149.325,69.225 147.3,69.225 145.025,66.95 v1(141.7,66.95)
Vout_1: IC2.4 IC19.5 IC19.14 IC19.15 R2.1 R31.1 Rshunt_1.1 Vout1.1 | length 133.2
  Top Layer w0.254: Vout1.1@65.05,37.525 v1(67.525,37.525) ; IC19.5@71.165,19.3 71.165,20.815 71.95,21.6 74.9,21.6 ; v1(72.425,30.875) 72.435,30.865 IC19.15@72.435,28.6 IC19.14@73.705,28.6 73.705,27.195 74.9,26 74.9,21.6 ; R31.1@80.675,22.275 76.975,22.275 76.3,21.6 74.9,21.6 ; v1(94.45,36.25) v1(100.15,36.25) ; Rshunt_1.1@106.85,22.55 106.85,21 107.75,20.1 R2.1@110.4,20.1 v1(110.4,22.45) ; v1(107.025,70.325) 107.52,69.83 IC2.4@107.52,68.2
  Bottom Layer w0.254: v1(67.525,37.525) 68.15,36.9 70.25,36.9 ; v1(72.425,30.875) 72.425,33.9 70.25,36.075 70.25,36.9 ; v1(94.45,36.25) 93.8,36.9 70.25,36.9 ; v1(107.025,70.325) 106.1,70.325 103.3,67.525 100.15,64.375 v1(100.15,36.25) 104.05,36.25 108.525,31.775 108.525,24.325 v1(110.4,22.45)
Vout_2: IC20.14 IC20.15 load_2.1 R32.1 Vout2.1 | length 56.6
  Top Layer w0.254: IC20.15@90.49,28.6 IC20.14@91.76,28.6 91.76,27.24 93.5,25.5 v1(100.775,25.5) ; v1(119.275,13.825) 123.525,13.825 ; R32.1@121.575,15.775 123.525,13.825 ; 123.525,13.85 Vout2.1@127.775,13.85 ; load_2.1@124.7,7.2 124.675,7.225 124.675,12.675 123.525,13.825
  Bottom Layer w0.254: v1(100.775,25.5) 100.775,21.25 103.525,18.5 106.325,18.5 110.95,13.875 119.225,13.875 v1(119.275,13.825)
Vs+: C29.2 IC18.4 L6.1 R27.2 Vs+_LDO.1 | length 31.2
  Top Layer w1: IC18.4@16.2,38.4 18.725,38.4 19.8,39.475 R27.2@25.375,39.475 27.45,39.475 ; L6.1@33.575,29.85 C29.2@33.575,34.5 32.425,34.5 27.45,39.475 ; Vs+_LDO.1@34.05,39.525 34,39.475 27.45,39.475
Vs+_OPA: C30.1 C31.1 C32.1 C33.1 C34.2 C35.2 C36.1 C49.1 IC19.12 IC19.13 IC20.12 IC20.13 L6.2 R39.2 Vs+_1.1 Vs+_2.1 Vs+_noise.1 | length 110.7
  Top Layer w1: C36.1@19.625,22.675 19.625,24.375 22.7,27.45 ; Vs+_noise.1@22.7,22.4 22.7,27.45 ; 35.175,27.8 L6.2@35.175,29.85 ; IC19.12@76.245,28.6 IC19.13@74.975,28.6 Vs+_1.1@74.975,33.975 ; IC20.13@93.03,28.6 IC20.12@94.3,28.6 94.3,30.6 ; Vs+_2.1@94.3,32.4 94.3,30.6 ; C35.2@104.4,30.625 C33.1@101.525,30.625 101.5,30.6 C32.1@98.55,30.6 94.3,30.6 ; 22.7,27.45 22.875,27.625 39.15,27.625 42.95,31.425 C49.1@50.35,31.425 R39.2@54.8,31.425 C34.2@58.25,31.425 C31.1@61.725,31.425 C30.1@64.975,31.425 66.875,31.425 69.425,33.975 Vs+_1.1@74.975,33.975 ; Vs+_1.1@74.975,33.975 83.725,33.975 87.1,30.6 94.3,30.6
pads on no net: IC1.1 IC1.2 IC1.4 IC1.5 IC1.10 IC1.11 IC1.13 IC1.14 IC1.16 IC1.17 IC1.47 IC1.48 IC1.50 IC1.51 IC3.1 IC4.1 IC5.1 IC6.4 IC6.5 IC6.8 IC7.1 IC8.1 IC9.1 IC10.1 IC11.1 IC12.1 IC13.1 IC14.1 IC17.1 IC17.2 IC17.3 IC17.6 IC17.7 IC19.2 IC19.9 IC19.16 IC20.2 IC20.9 IC20.16 IC21.10 IC21.11 IC22.9 IC22.12 IC24.1 IC24.5 IC24.8 J1.7 J1.8 J3.3 J5.9 J5.11 J5.13 J6.5 J6.6 J6.7 J7.3

## Polygon pours and split planes (outlines as drawn)
no net on GND (split plane): 151.89,0.51 0.51,0.51 0.51,101.09 151.89,101.09
no net on Vcc (split plane): 151.89,0.51 0.51,0.51 0.51,101.09 151.89,101.09

## Text inside footprints (layer, text, board x,y; h text height)
J4: Top Overlay "1" at 146.53,26.895 h0.7 r90; Mechanical 14 "1" at 146.53,26.895 h0.7 r90
J5: Top Overlay "1" at 101.067,5.768 h0.7 r180; Mechanical 14 "1" at 101.067,5.768 h0.7 r180
SW1: Top Overlay "ON" at 147.405,50.045 h0.7; Top Overlay "2" at 149.056,46.489 h0.7; Top Overlay "1" at 147.786,46.489 h0.7; Mechanical 14 "ON" at 147.405,50.055 h0.7; Mechanical 14 "2" at 149.056,46.499 h0.7; Mechanical 14 "1" at 147.786,46.499 h0.7